# Altium PCB SPT3G_LCBoardRev5.PcbDoc (part 2 of 4)
Units mil, origin at the board's own origin, x right, y up, seen from the top; angles counter-clockwise.
Board outline 7275.33 x 1969 mil, 6 copper layers (Top Layer, Signal Layer 1, Internal Plane 1, Internal Plane 2, Signal Layer 2, Bottom Layer), stack 61.6 mil thick; 26 components, 141 nets, 668 pads, 146 vias.
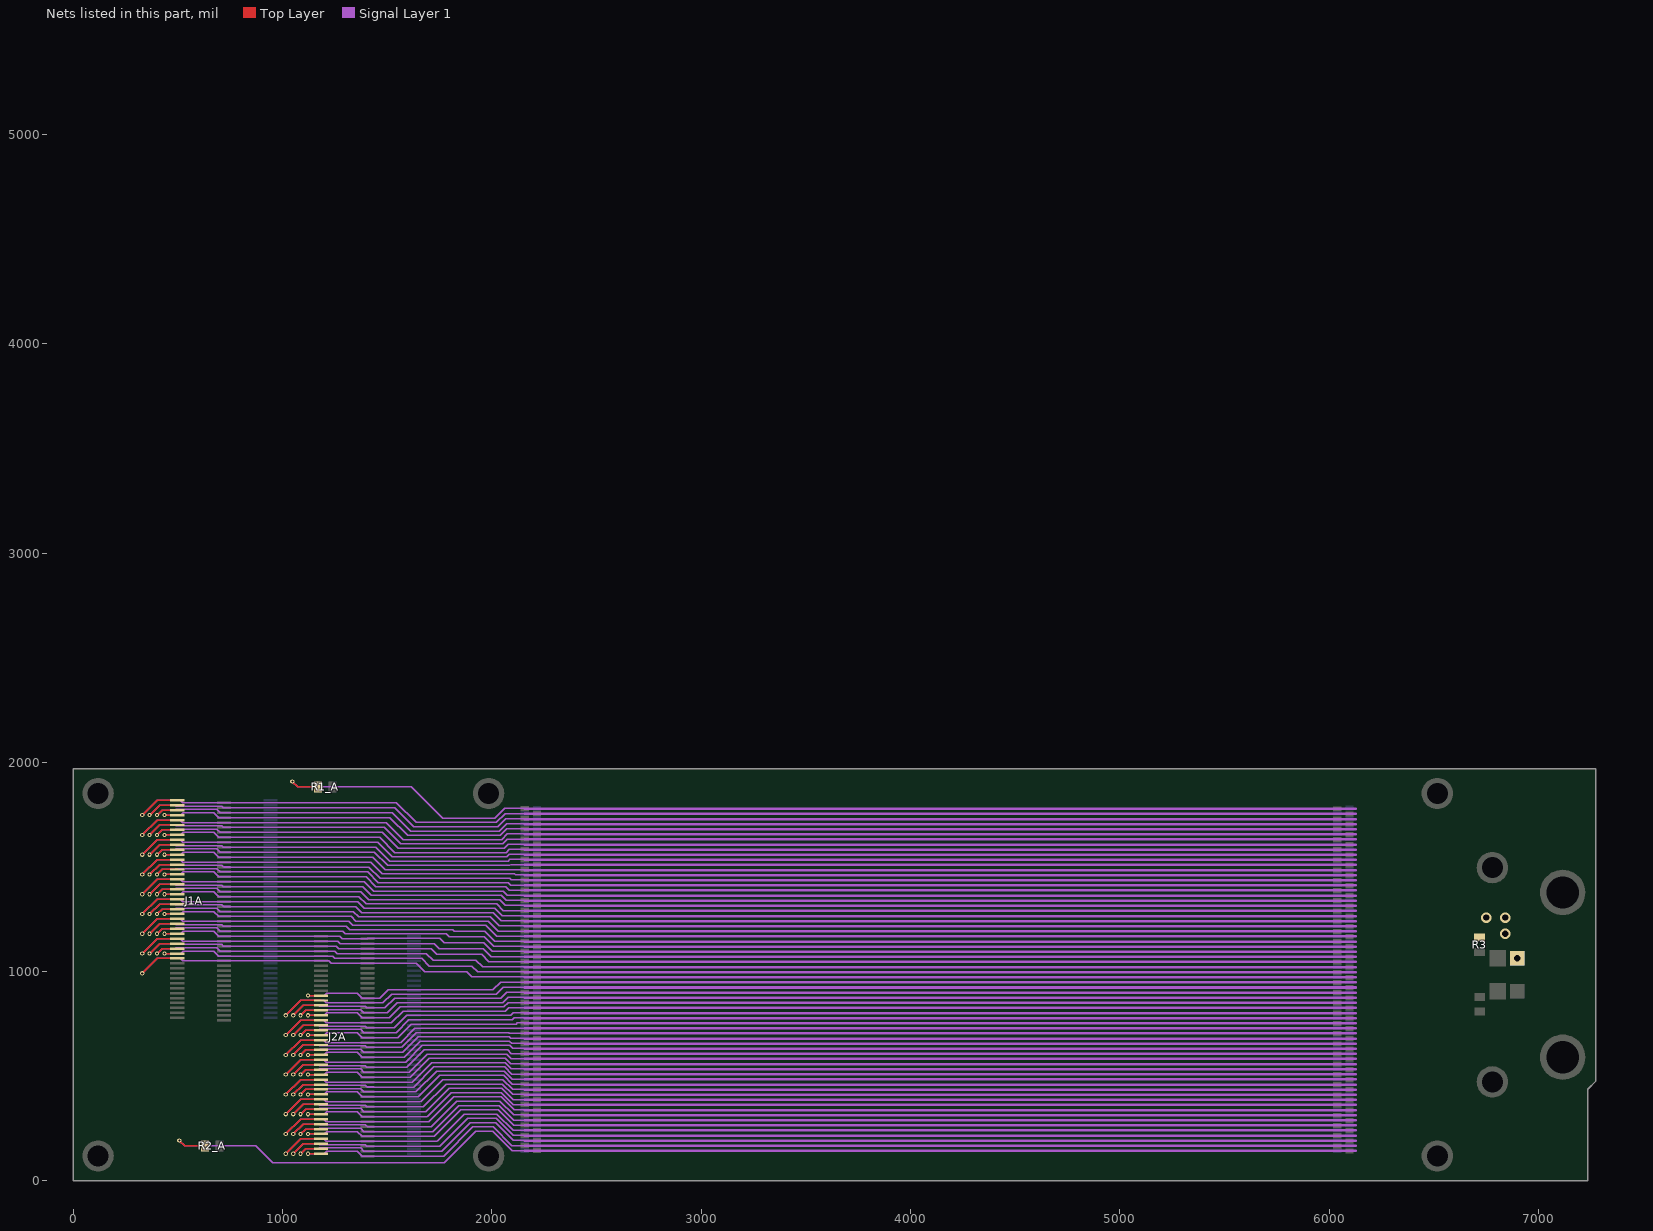
[diagram p6: the nets of this part, all layers, seen from the top]

## Via types
v1: diameter 20, hole 10, Top Layer to Bottom Layer, 136 vias
v2: diameter 50, hole 30, Top Layer to Bottom Layer, 10 vias

## Nets (pads, with @x,y where several pads share a name; then routed paths per layer and width w, separated by ;. In a path a pad name is that pad's centre, name@x,y a point inside that pad or via, vN(x,y) a via of type N, cw(c..) or ccw(c..) an arc to the next point about the centre after c; other vN are vias at no path point) (continued)
BOLORETURN_A: J1A.1 J1A.3 J1A.5 J1A.7 J1A.9 J1A.11 J1A.13 J1A.15 J1A.17 J1A.19 J1A.21 J1A.23 J1A.25 J1A.27 J1A.29 J1A.31 J1A.33 J1A.35 J1A.37 J1A.39 J1A.41 J1A.43 J1A.45 J1A.47 J1A.49 J1A.51 J1A.53 J1A.55 J1A.57 J1A.59 J1A.61 J1A.63 J1A.65 J2A.25 J2A.27 J2A.29 J2A.31 J2A.33 J2A.35 J2A.37 J2A.39 J2A.41 J2A.43 J2A.45 J2A.47 J2A.49 J2A.51 J2A.53 J2A.55 J2A.57 J2A.59 J2A.61 J2A.63 J2A.65 J2A.67 J2A.69 J2A.71 J2A.73 J2A.75 J2A.77 J2A.79 J2A.81 J2A.83 J2A.85 J2A.87 J2A.89 pad.0@6899.91,1063.92 R1_A.1 R2_A.1 R3.2 | length 384722.8
  Top Layer w6: v1(329.06,991.73) 399.92,1062.6 J1A.65@496.38,1062.6 ; v1(329.06,1086.22) 399.92,1157.09 J1A.57@496.38,1157.09 ; v1(329.06,1180.71) 399.92,1251.58 J1A.49@496.38,1251.58 ; v1(329.06,1275.2) 399.92,1346.06 J1A.41@496.38,1346.06 ; v1(329.06,1369.69) 399.92,1440.55 J1A.33@496.38,1440.55 ; v1(329.06,1464.17) 399.92,1535.04 J1A.25@496.38,1535.04 ; v1(329.06,1558.66) 399.92,1629.53 J1A.17@496.38,1629.53 ; v1(329.06,1653.15) 399.92,1724.02 J1A.9@496.38,1724.02 ; v1(329.06,1747.64) 399.92,1818.5 J1A.1@496.38,1818.5 ; v1(364.49,1086.22) 411.73,1133.46 J1A.59@496.38,1133.47 ; v1(364.49,1180.71) 411.73,1227.95 J1A.51@496.38,1227.95 ; v1(364.49,1275.2) 411.73,1322.44 J1A.43@496.38,1322.44 ; v1(364.49,1369.69) 411.73,1416.93 J1A.35@496.38,1416.93 ; v1(364.49,1464.17) 411.73,1511.42 J1A.27@496.38,1511.42 ; v1(364.49,1558.66) 411.73,1605.91 J1A.19@496.38,1605.91 ; v1(364.49,1653.15) 411.73,1700.39 J1A.11@496.38,1700.39 ; v1(364.49,1747.64) 411.73,1794.88 J1A.3@496.38,1794.88 ; v1(399.92,1086.22) 423.54,1109.84 J1A.61@496.38,1109.84 ; v1(399.92,1180.71) 423.54,1204.33 J1A.53@496.38,1204.33 ; v1(399.92,1275.2) 423.54,1298.82 J1A.45@496.38,1298.82 ; v1(399.92,1369.69) 423.54,1393.31 J1A.37@496.38,1393.31 ; v1(399.92,1464.17) 423.54,1487.8 J1A.29@496.38,1487.8 ; v1(399.92,1558.66) 423.54,1582.28 J1A.21@496.38,1582.28 ; v1(399.92,1653.15) 423.54,1676.77 J1A.13@496.38,1676.77 ; v1(399.92,1747.64) 423.54,1771.26 J1A.5@496.38,1771.26 ; v1(435.36,1086.22) J1A.63@496.38,1086.22 ; v1(435.35,1180.71) J1A.55@496.38,1180.71 ; v1(435.35,1275.2) J1A.47@496.38,1275.2 ; v1(435.35,1369.69) J1A.39@496.38,1369.69 ; v1(435.36,1464.17) J1A.31@496.38,1464.17 ; v1(435.36,1558.66) J1A.23@496.38,1558.66 ; v1(435.35,1653.15) J1A.15@496.38,1653.15 ; v1(435.35,1747.64) J1A.7@496.38,1747.64 ; v1(506.24,192.8) 531.78,167.27 R2_A.1@628.32,167.27 ; v1(1015.04,129.53) 1085.91,200.39 J2A.83@1182.36,200.39 ; v1(1015.04,224.02) 1085.91,294.88 J2A.75@1182.36,294.88 ; v1(1015.04,318.5) 1085.91,389.37 J2A.67@1182.36,389.37 ; v1(1015.04,412.99) 1085.91,483.86 J2A.59@1182.36,483.86 ; v1(1015.04,507.48) 1085.91,578.35 J2A.51@1182.36,578.35 ; v1(1015.04,601.97) 1085.91,672.84 J2A.43@1182.36,672.84 ; v1(1015.04,696.46) 1085.91,767.32 J2A.35@1182.36,767.32 ; v1(1015.04,790.95) 1085.91,861.81 J2A.27@1182.36,861.81 ; v1(1046.3,1908.04) 1071.83,1882.5 R1_A.1@1168.38,1882.5 ; v1(1050.47,129.53) 1097.72,176.77 J2A.85@1182.36,176.77 ; v1(1050.47,224.02) 1097.72,271.26 J2A.77@1182.36,271.26 ; v1(1050.47,318.5) 1097.72,365.75 J2A.69@1182.36,365.75 ; v1(1050.47,412.99) 1097.72,460.24 J2A.61@1182.36,460.24 ; v1(1050.47,507.48) 1097.72,554.73 J2A.53@1182.36,554.72 ; v1(1050.47,601.97) 1097.72,649.21 J2A.45@1182.36,649.21 ; v1(1050.47,696.46) 1097.72,743.7 J2A.37@1182.36,743.7 ; v1(1050.47,790.95) 1097.72,838.19 J2A.29@1182.36,838.19 ; v1(1085.91,129.53) 1109.53,153.15 J2A.87@1182.36,153.15 ; v1(1085.91,224.02) 1109.53,247.64 J2A.79@1182.36,247.64 ; v1(1085.91,318.5) 1109.53,342.13 J2A.71@1182.36,342.13 ; v1(1085.91,412.99) 1109.53,436.61 J2A.63@1182.36,436.61 ; v1(1085.91,507.48) 1109.53,531.1 J2A.55@1182.36,531.1 ; v1(1085.91,601.97) 1109.53,625.59 J2A.47@1182.36,625.59 ; v1(1085.91,696.46) 1109.53,720.08 J2A.39@1182.36,720.08 ; v1(1085.91,790.95) 1109.53,814.57 J2A.31@1182.36,814.57 ; v1(1121.34,129.53) J2A.89@1182.36,129.53 ; v1(1121.34,224.02) J2A.81@1182.36,224.02 ; v1(1121.34,318.5) J2A.73@1182.36,318.5 ; v1(1121.34,412.99) J2A.65@1182.36,412.99 ; v1(1121.34,507.48) J2A.57@1182.36,507.48 ; v1(1121.34,601.97) J2A.49@1182.36,601.97 ; v1(1121.34,696.46) J2A.41@1182.36,696.46 ; v1(1121.34,790.95) J2A.33@1182.36,790.95 ; v1(1121.34,885.43) J2A.25@1182.36,885.43
  Signal Layer 1 w6: v1(329.06,991.73) 399.92,1062.6 510.86,1062.6 522.68,1050.79 748.86,1050.79 ; v1(329.06,1086.22) 399.92,1157.09 510.86,1157.09 522.68,1145.28 748.86,1145.28 ; v1(329.06,1180.71) 399.92,1251.58 510.86,1251.58 522.68,1239.76 748.86,1239.76 ; v1(329.06,1275.2) 399.92,1346.06 510.86,1346.06 522.68,1334.25 748.86,1334.25 ; v1(329.06,1369.69) 399.92,1440.55 510.86,1440.55 522.68,1428.74 748.86,1428.74 ; v1(329.06,1464.17) 399.92,1535.04 510.86,1535.04 522.68,1523.23 1419.84,1523.23 1476.55,1466.52 1958.38,1466.52 ; v1(329.06,1558.66) 399.92,1629.53 510.86,1629.53 522.68,1617.72 748.86,1617.72 ; v1(329.06,1653.15) 399.92,1724.02 510.86,1724.02 522.68,1712.21 748.86,1712.21 ; v1(329.06,1747.64) 399.92,1818.5 510.86,1818.5 522.68,1806.69 1543.46,1806.69 1637.76,1712.4 1958.38,1712.4 ; v1(364.49,1086.22) 411.73,1133.46 486.38,1133.46 490.32,1129.53 708.21,1129.53 715.74,1122 748.86,1122 ; v1(364.49,1180.71) 411.73,1227.95 486.38,1227.95 490.32,1224.02 708.21,1224.02 715.74,1216.49 748.86,1216.49 ; v1(364.49,1275.2) 411.73,1322.44 486.38,1322.44 490.32,1318.5 708.21,1318.5 715.74,1310.98 748.86,1310.98 ; v1(364.49,1369.69) 411.73,1416.93 486.38,1416.93 490.32,1412.99 708.21,1412.99 715.74,1405.47 748.86,1405.47 ; v1(364.49,1464.17) 411.73,1511.42 486.38,1511.42 490.32,1507.48 708.21,1507.48 715.74,1499.96 748.86,1499.96 ; v1(364.49,1558.66) 411.73,1605.91 486.38,1605.91 490.32,1601.97 708.21,1601.97 715.74,1594.45 748.86,1594.45 ; v1(364.49,1653.15) 411.73,1700.39 486.38,1700.39 490.32,1696.46 708.21,1696.46 715.74,1688.93 748.86,1688.93 ; v1(364.49,1747.64) 411.73,1794.88 486.38,1794.88 490.32,1790.95 708.21,1790.95 715.74,1783.42 748.86,1783.42 ; v1(399.92,1086.22) 423.54,1109.84 486.38,1109.84 490.32,1113.78 686.31,1113.78 702.06,1098.03 748.86,1098.03 ; v1(399.92,1180.71) 423.54,1204.33 486.38,1204.33 490.32,1208.27 686.31,1208.27 702.06,1192.52 748.86,1192.52 ; v1(399.92,1275.2) 423.54,1298.82 486.38,1298.82 490.32,1302.76 686.31,1302.76 702.06,1287.01 748.86,1287.01 ; v1(399.92,1369.69) 423.54,1393.31 486.38,1393.31 490.32,1397.24 686.31,1397.24 702.06,1381.5 1374.18,1381.5 1412.1,1343.58 1958.38,1343.58 ; v1(399.92,1464.17) 423.54,1487.8 486.38,1487.8 490.32,1491.73 686.31,1491.73 702.06,1475.98 1406.47,1475.98 1456.92,1425.54 1958.38,1425.54 ; v1(399.92,1558.66) 423.54,1582.28 486.38,1582.28 490.32,1586.22 686.31,1586.22 702.06,1570.47 748.86,1570.47 ; v1(399.92,1653.15) 423.54,1676.77 486.38,1676.77 490.32,1680.71 686.31,1680.71 702.06,1664.96 1476.99,1664.96 1552.49,1589.46 1958.38,1589.46 ; v1(399.92,1747.64) 423.54,1771.26 486.38,1771.26 490.32,1775.2 686.31,1775.2 702.06,1759.45 1524.09,1759.45 1612.12,1671.42 1958.38,1671.42 ; v1(435.36,1086.22) 512.61,1086.22 524.42,1098.03 670.42,1098.03 694.04,1074.41 748.86,1074.41 ; v1(435.35,1180.71) 512.61,1180.71 524.42,1192.52 670.42,1192.52 694.04,1168.9 748.86,1168.9 ; v1(435.35,1275.2) 512.61,1275.2 524.42,1287.01 670.42,1287.01 694.04,1263.39 1328.07,1263.39 1350.33,1241.13 1958.38,1241.13 ; v1(435.35,1369.69) 512.61,1369.69 524.42,1381.5 670.42,1381.5 694.04,1357.87 748.86,1357.87 ; v1(435.36,1464.17) 512.61,1464.17 524.42,1475.98 670.42,1475.98 694.04,1452.36 748.86,1452.36 ; v1(435.36,1558.66) 512.61,1558.66 524.42,1570.47 670.42,1570.47 694.04,1546.85 748.86,1546.85 ; v1(435.35,1653.15) 512.61,1653.15 524.42,1664.96 670.42,1664.96 694.04,1641.34 748.86,1641.34 ; v1(435.35,1747.64) 512.61,1747.64 524.42,1759.45 670.42,1759.45 694.04,1735.83 748.86,1735.83 ; v1(506.24,192.8) 531.78,167.27 871.18,167.27 951.81,86.64 1772.92,86.64 1923.4,237.11 1958.38,237.11 ; 718.82,1050.79 1182.36,1050.79 1221.28,1050.79 ; 718.82,1074.41 1182.36,1074.41 1238.26,1074.41 ; 718.82,1098.03 1182.36,1098.03 1248.47,1098.03 ; 718.82,1121.65 1182.36,1121.65 1257.03,1121.65 ; 718.82,1145.28 1182.36,1145.28 1263.24,1145.28 ; 718.82,1168.9 1273.7,1168.9 1285.51,1157.09 1404.8,1157.09 1406.88,1159.16 1750.44,1159.16 1771.95,1137.65 1958.72,1137.65 ; 718.82,1192.52 1287.03,1192.52 1299.9,1179.65 1781.49,1179.65 1795.73,1165.41 1958.72,1165.41 ; 718.82,1216.14 1304.54,1216.14 1320.54,1200.14 1812.16,1200.14 1819.14,1193.17 1958.72,1193.17 ; 718.82,1239.76 1315.52,1239.76 1334.37,1220.92 1958.72,1220.92 ; 718.82,1287.01 1338.05,1287.01 1363.45,1261.62 1958.38,1261.62 ; 718.82,1310.63 1349.04,1310.63 1377.56,1282.11 1958.38,1282.11 ; 718.82,1334.25 1357.79,1334.25 1389.45,1302.6 1958.38,1302.6 ; 718.82,1357.87 1363.52,1357.87 1398.31,1323.09 1958.38,1323.09 ; 718.82,1405.12 1383.49,1405.12 1424.55,1364.07 1958.38,1364.07 ; 718.82,1428.74 1390.57,1428.74 1434.76,1384.56 1958.38,1384.56 ; 718.82,1452.36 1398.72,1452.36 1446.03,1405.05 1958.38,1405.05 ; 718.82,1499.61 1411.85,1499.61 1465.43,1446.03 1958.38,1446.03 ; 718.82,1546.85 1430,1546.85 1489.84,1487.01 1958.38,1487.01 ; 718.82,1570.47 1438.9,1570.47 1501.88,1507.5 1958.38,1507.5 ; 718.82,1594.09 1445.76,1594.09 1511.87,1527.99 1958.38,1527.99 ; 718.82,1617.72 1454.69,1617.72 1523.93,1548.48 1958.38,1548.48 ; 718.82,1641.34 1463.21,1641.34 1535.58,1568.97 1958.38,1568.97 ; 718.82,1688.58 1484.62,1688.58 1563.26,1609.95 1776.38,1609.95 ; 718.82,1712.21 1495.61,1712.21 1577.38,1630.44 1958.38,1630.44 ; 718.82,1735.83 1512.18,1735.83 1597.08,1650.93 1726.38,1650.93 ; 718.82,1783.07 1535.27,1783.07 1626.43,1691.91 1958.38,1691.91 ; v1(1015.04,129.53) 1085.91,200.39 1196.85,200.39 1208.66,188.58 1434.84,188.58 ; v1(1015.04,224.02) 1085.91,294.88 1196.85,294.88 1208.66,283.07 1434.84,283.07 ; v1(1015.04,318.5) 1085.91,389.37 1196.85,389.37 1208.66,377.56 1434.84,377.56 ; v1(1015.04,412.99) 1085.91,483.86 1196.85,483.86 1208.66,472.05 1434.84,472.05 ; v1(1015.04,507.48) 1085.91,578.35 1196.85,578.35 1208.66,566.54 1434.84,566.54 ; v1(1015.04,601.97) 1085.91,672.84 1196.85,672.84 1208.66,661.02 1434.84,661.02 ; v1(1015.04,696.46) 1085.91,767.32 1196.85,767.32 1208.66,755.51 1434.84,755.51 ; v1(1015.04,790.95) 1085.91,861.81 1196.85,861.81 1208.66,850 1434.84,850 ; v1(1046.3,1908.04) 1071.83,1882.5 1614.87,1882.5 1764.49,1732.89 1958.38,1732.89 ; v1(1050.47,129.53) 1097.72,176.77 1172.36,176.77 1176.3,172.84 1394.2,172.84 1402.07,164.96 1751.59,164.96 ; v1(1050.47,224.02) 1097.72,271.26 1172.36,271.26 1176.3,267.32 1394.2,267.32 1401.72,259.8 ; v1(1050.47,318.5) 1097.72,365.75 1172.36,365.75 1176.3,361.81 1394.2,361.81 1401.72,354.29 1434.84,354.29 ; v1(1050.47,412.99) 1097.72,460.24 1172.36,460.24 1176.3,456.3 1394.2,456.3 1401.72,448.78 1434.84,448.78 ; v1(1050.47,507.48) 1097.72,554.73 1172.36,554.73 1176.3,550.79 1394.2,550.79 1401.72,543.26 1434.84,543.26 ; v1(1050.47,601.97) 1097.72,649.21 1172.36,649.21 1176.3,645.28 1394.2,645.28 1401.72,637.75 1434.84,637.75 ; v1(1050.47,696.46) 1097.72,743.7 1172.36,743.7 1176.3,739.76 1394.2,739.76 1401.72,732.24 1434.84,732.24 ; v1(1050.47,790.95) 1097.72,838.19 1172.36,838.19 1176.3,834.25 1394.2,834.25 1401.72,826.73 1434.84,826.73 ; v1(1085.91,129.53) 1109.53,153.15 1172.36,153.15 1176.3,157.09 1372.29,157.09 1388.04,141.34 1434.84,141.34 ; v1(1085.91,224.02) 1109.53,247.64 1172.36,247.64 1176.3,251.58 1372.29,251.58 1388.04,235.83 1434.84,235.83 ; v1(1085.91,318.5) 1109.53,342.13 1172.36,342.13 1176.3,346.06 1372.29,346.06 1388.04,330.32 1434.84,330.32 ; v1(1085.91,412.99) 1109.53,436.61 1172.36,436.61 1176.3,440.55 1372.29,440.55 1388.04,424.8 1434.84,424.8 ; v1(1085.91,507.48) 1109.53,531.1 1172.36,531.1 1176.3,535.04 1372.29,535.04 1388.04,519.29 1605.01,519.29 1691.68,605.93 1958.38,605.93 ; v1(1085.91,601.97) 1109.53,625.59 1172.36,625.59 1176.3,629.53 1372.29,629.53 1388.04,613.78 1434.84,613.78 ; v1(1085.91,696.46) 1109.53,720.08 1172.36,720.08 1176.3,724.02 1372.29,724.02 1388.04,708.27 1434.84,708.27 ; v1(1085.91,790.95) 1109.53,814.57 1172.36,814.57 1176.3,818.5 1372.29,818.5 1388.04,802.76 1434.84,802.76 ; v1(1121.34,129.53) 1198.59,129.53 1210.4,141.34 1356.4,141.34 1380.02,117.72 1434.84,117.72 ; v1(1121.34,224.02) 1198.59,224.02 1210.4,235.83 1356.4,235.83 1380.02,212.21 1434.84,212.21 ; v1(1121.34,318.5) 1198.59,318.5 1210.4,330.32 1356.4,330.32 1380.02,306.69 1434.84,306.69 ; v1(1121.34,412.99) 1198.59,412.99 1210.4,424.8 1356.4,424.8 1380.02,401.18 1434.84,401.18 ; v1(1121.34,507.48) 1198.59,507.48 1210.4,519.29 1356.4,519.29 1380.02,495.67 1434.84,495.67 ; v1(1121.34,601.97) 1198.59,601.97 1210.4,613.78 1356.4,613.78 1380.02,590.16 1580.94,590.16 1658.15,667.4 1958.38,667.4 ; v1(1121.34,696.46) 1198.59,696.46 1210.4,708.27 1356.4,708.27 1380.02,684.65 1434.84,684.65 ; v1(1121.34,790.95) 1198.59,790.95 1210.4,802.76 1356.4,802.76 1380.02,779.13 1434.84,779.13 ; v1(1121.34,885.43) 1198.59,885.43 1210.4,897.24 1356.4,897.24 1380.02,873.62 1463.75,873.62 ; 1221.22,1050.79 1233.03,1038.98 1639.45,1038.98 1679.55,998.87 1861.66,998.87 ; 1238.23,1074.41 1250.04,1062.6 1663.61,1062.6 1699.58,1026.63 1861.66,1026.63 ; 1248.36,1098.03 1260.17,1086.22 1687.06,1086.22 1718.89,1054.39 1861.66,1054.39 ; 1257.11,1121.65 1268.92,1109.84 1404.8,1109.84 1709.33,1109.84 1737.03,1082.14 1951.07,1082.14 ; 1263.33,1145.28 1275.14,1133.47 1404.8,1133.47 1725.49,1133.47 1749.06,1109.9 1958.72,1109.9 ; 1404.8,117.72 1769.75,117.72 ; 1404.8,141.34 1759.75,141.34 ; 1404.8,188.58 1737.07,188.58 ; 1404.8,212.21 1724.61,212.21 ; 1404.8,235.83 1716.65,235.83 1840.9,360.05 1958.38,360.05 ; 1404.8,259.45 1709.93,259.45 ; 1404.8,283.07 1698.9,283.07 ; 1404.8,306.69 1689.72,306.69 ; 1404.8,330.32 1684.22,330.32 ; 1404.8,353.94 1671.96,353.94 ; 1404.8,377.56 1658.47,377.56 ; 1404.8,401.18 1648.26,401.18 ; 1404.8,424.8 1636,424.8 1735.2,523.97 1958.38,523.97 ; 1404.8,448.43 1627.23,448.43 ; 1404.8,472.05 1618.46,472.05 ; 1404.8,495.67 1610.91,495.67 ; 1404.8,542.91 1592.13,542.91 ; 1404.8,566.54 1587.05,566.54 ; 1404.8,613.78 1574.42,613.78 ; 1404.8,637.4 1567.7,637.4 ; 1404.8,661.02 1563.03,661.02 ; 1404.8,684.65 1549.13,684.65 1613.84,749.36 1958.38,749.36 ; 1404.8,708.27 1541.79,708.27 1603.37,769.85 1958.38,769.85 ; 1404.8,731.89 1533.83,731.89 ; 1404.8,755.51 1519.93,755.51 ; 1404.8,779.13 1510.34,779.13 ; 1404.8,802.76 1499.16,802.76 ; 1404.8,826.38 1488.86,826.38 1534.8,872.3 1958.38,872.3 ; 1404.8,850 1478.26,850 ; 1464.02,873.62 1503.68,913.28 1958.38,913.28 ; 1477.74,850 1520.54,892.79 1958.38,892.79 ; 1499.64,802.76 1548.7,851.81 1958.38,851.81 ; 1510.4,779.13 1562.59,831.32 1958.38,831.32 ; 1520.06,755.51 1575.38,810.83 1958.38,810.83 ; 1533.66,731.89 1592.11,790.34 1958.38,790.34 ; 1563.25,661.02 1631.1,728.87 1958.38,728.87 ; 1568.15,637.4 1639.13,708.38 1958.38,708.38 ; 1574.53,613.78 1648.64,687.89 1958.38,687.89 ; 1587.28,566.54 1667.66,646.91 1958.38,646.91 ; 1592.28,542.91 1675.79,626.42 1958.38,626.42 ; 1610.89,495.67 1700.67,585.44 1958.38,585.44 ; 1618.68,472.05 1711.59,564.95 1958.38,564.95 ; 1627.17,448.43 1723.21,544.46 1958.38,544.46 ; 1648.41,401.18 1750.71,503.48 1958.38,503.48 ; 1658.78,377.56 1764.22,482.99 1958.38,482.99 ; 1672.16,353.94 1780.73,462.5 1958.38,462.5 ; 1684.54,330.32 1796.24,442.01 1958.38,442.01 ; 1689.92,306.69 1804.75,421.52 1958.38,421.52 ; 1698.98,283.07 1816.94,401.03 1958.38,401.03 ; 1709.95,259.45 1831.04,380.54 1958.38,380.54 ; 1724.74,212.21 1852.1,339.56 1958.38,339.56 ; 1737.64,188.58 1868.13,319.07 1958.38,319.07 ; 1751.43,164.96 1885.05,298.58 1958.38,298.58 ; 1759.74,141.34 1896.5,278.09 1958.38,278.09 ; 1769.67,117.72 1909.55,257.6 1958.38,257.6 ; 2126.38,144.25 2215.78,144.25 ; 2126.38,168.66 2156.73,168.66 ; 2126.38,193.07 2215.78,193.07 ; 2126.38,217.48 2156.73,217.48 ; 2126.38,241.89 2215.78,241.89 ; 2126.38,266.3 2156.73,266.3 ; 2126.38,290.71 2215.78,290.71 ; 2126.38,315.11 2156.73,315.11 ; 2126.38,339.52 2215.78,339.52 ; 2126.38,363.93 2156.73,363.93 ; 2126.38,388.34 2215.78,388.34 ; 2126.38,412.75 2156.73,412.75 ; 2126.38,437.16 2215.78,437.16 ; 2126.38,461.57 2156.73,461.57 ; 2126.38,485.98 2215.78,485.98 ; 2126.38,510.39 2156.73,510.39 ; 2126.38,534.8 2215.78,534.8 ; 2126.38,559.21 2156.73,559.21 ; 2126.38,583.62 2215.78,583.62 ; 2126.38,608.03 2156.73,608.03 ; 2126.38,632.44 2215.78,632.44 ; 2126.38,656.85 2156.73,656.85 ; 2126.38,681.26 2215.78,681.26 ; 2126.38,705.67 2156.73,705.67 ; 2126.38,730.08 2215.78,730.08 ; 2126.38,754.48 2156.73,754.48 ; 2126.38,778.89 2215.78,778.89 ; 2126.38,803.3 2156.73,803.3 ; 2126.38,827.71 2215.78,827.71 ; 2126.38,852.12 2156.73,852.12 ; 2126.38,876.53 2215.78,876.53 ; 2126.38,900.94 2156.73,900.94 ; 2126.38,925.35 2215.78,925.35 ; 2126.38,949.76 2156.73,949.76 ; 2126.38,974.17 2215.78,974.17 ; 2126.38,998.58 2156.73,998.58 ; 2126.38,1022.99 2215.78,1022.99 ; 2126.38,1047.4 2156.73,1047.4 ; 2126.38,1071.81 2215.78,1071.81 ; 2126.38,1096.22 2156.73,1096.22 ; 2126.38,1120.63 2215.78,1120.63 ; 2126.38,1145.04 2156.73,1145.04 ; 2126.38,1169.45 2215.78,1169.45 ; 2126.38,1193.85 2156.73,1193.85 ; 2126.38,1218.26 2215.78,1218.26 ; 2126.38,1242.67 2156.73,1242.67 ; 2126.38,1267.08 2215.78,1267.08 ; 2126.38,1291.49 2156.73,1291.49 ; 2126.38,1315.9 2215.78,1315.9 ; 2126.38,1340.31 2156.73,1340.31 ; 2126.38,1364.72 2215.78,1364.72 ; 2126.38,1389.13 2156.73,1389.13 ; 2126.38,1413.54 2215.78,1413.54 ; 2126.38,1437.95 2156.73,1437.95 ; 2126.38,1462.36 2215.78,1462.36 ; 2126.38,1486.77 2156.73,1486.77 ; 2126.38,1511.18 2215.78,1511.18 ; 2126.38,1535.59 2156.73,1535.59 ; 2126.38,1560 2215.78,1560 ; 2126.38,1584.41 2156.73,1584.41 ; 2126.38,1608.82 2215.78,1608.82 ; 2126.38,1633.22 2156.73,1633.22 ; 2126.38,1657.63 2215.78,1657.63 ; 2126.38,1682.04 2156.73,1682.04 ; 2126.38,1706.45 2215.78,1706.45 ; 2126.38,1730.86 2156.73,1730.86 ; 2126.38,1755.27 2215.78,1755.27 ; 2126.38,1779.68 2156.73,1779.68 ; 1726.38,1650.93 1958.38,1650.93 1726.38,1650.93 ; 1776.38,1609.95 1958.38,1609.95 1776.38,1609.95
  Signal Layer 1 w6.01: 1861.66,998.87 1879.11,998.87 1903.81,974.17 2126.38,974.17 ; 1861.66,1026.63 1904.32,1026.63 1932.38,998.58 2126.38,998.58 ; 1861.66,1054.39 1923.82,1054.39 1955.21,1022.99 2126.38,1022.99 ; 1951.07,1082.14 1985.81,1047.4 2126.38,1047.4 ; 1958.38,237.11 2004.47,237.11 2097.33,144.25 2126.38,144.25 ; 1958.38,257.6 2006.9,257.6 2095.84,168.66 2126.38,168.66 ; 1958.38,278.09 2017.97,278.09 2102.99,193.07 2126.38,193.07 ; 1958.38,298.58 2021.48,298.58 2102.59,217.48 2126.38,217.48 ; 1958.38,319.07 2023.66,319.07 2100.85,241.89 2126.38,241.89 ; 1958.38,339.56 2030.29,339.56 2103.55,266.3 2126.38,266.3 ; 1958.38,360.05 2036.02,360.05 2105.37,290.71 2126.38,290.71 ; 1958.38,380.54 2038.2,380.54 2103.63,315.11 2126.38,315.11 ; 1958.38,401.03 2045.72,401.03 2107.22,339.52 2126.38,339.52 ; 1958.38,421.52 2043.9,421.52 2101.48,363.93 2126.38,363.93 ; 1958.38,442.01 2047.85,442.01 2101.52,388.34 2126.38,388.34 ; 1958.38,462.5 2050.03,462.5 2099.78,412.75 2126.38,412.75 ; 1958.38,482.99 2052.66,482.99 2098.49,437.16 2126.38,437.16 ; 1958.38,503.48 2055.73,503.48 2097.64,461.57 2126.38,461.57 ; 1958.38,523.97 2059.68,523.97 2097.67,485.98 2126.38,485.98 ; 1958.38,544.46 2060.53,544.46 2094.6,510.39 2126.38,510.39 ; 1958.38,564.95 2063.15,564.95 2093.31,534.8 2126.38,534.8 ; 1958.38,585.44 2064.44,585.44 2090.68,559.21 2126.38,559.21 ; 1958.38,605.93 2069.73,605.93 2092.05,583.62 2126.38,583.62 ; 1958.38,626.42 2074.58,626.42 2092.98,608.03 2126.38,608.03 ; 1958.38,646.91 2084.76,646.91 2099.24,632.44 2126.38,632.44 ; 1958.38,667.4 2083.39,667.4 2093.94,656.85 2126.38,656.85 ; 1958.38,687.89 2082.45,687.89 2089.09,681.26 2126.38,681.26 ; 1958.38,708.38 2080.63,708.38 2083.35,705.67 2126.38,705.67 ; 1958.38,728.87 2105.05,728.87 2106.25,730.08 2126.38,730.08 ; 1958.38,749.36 2116.65,749.36 2121.77,754.48 2126.38,754.48 ; 1958.38,769.85 2097.14,769.85 2106.18,778.89 2126.38,778.89 ; 1958.38,790.34 2090.07,790.34 2103.03,803.3 2126.38,803.3 ; 1958.38,810.83 2062.99,810.83 2079.87,827.71 2126.38,827.71 ; 1958.38,831.32 2056.82,831.32 2077.61,852.12 2126.38,852.12 ; 1958.38,851.81 2052.41,851.81 2077.13,876.53 2126.38,876.53 ; 1958.38,872.3 2042.23,872.3 2070.87,900.94 2126.38,900.94 ; 1958.38,892.79 2020.49,892.79 2053.05,925.35 2126.38,925.35 ; 1958.38,913.28 2004.98,913.28 2041.46,949.76 2126.38,949.76 ; 1958.38,1241.13 1981.91,1241.13 2029.18,1193.85 2126.38,1193.85 ; 1958.38,1261.62 1992.2,1261.62 2035.55,1218.26 2126.38,1218.26 ; 1958.38,1282.11 2006.07,1282.11 2045.5,1242.67 2126.38,1242.67 ; 1958.38,1302.6 2014.22,1302.6 2049.73,1267.08 2126.38,1267.08 ; 1958.38,1323.09 2023.08,1323.09 2054.67,1291.49 2126.38,1291.49 ; 1958.38,1343.58 2036.23,1343.58 2063.91,1315.9 2126.38,1315.9 ; 1958.38,1364.07 2043.66,1364.07 2067.42,1340.31 2126.38,1340.31 ; 1958.38,1384.56 2053.95,1384.56 2073.79,1364.72 2126.38,1364.72 ; 1958.38,1405.05 2066.39,1405.05 2082.31,1389.13 2126.38,1389.13 ; 1958.38,1425.54 2078.12,1425.54 2090.11,1413.54 2126.38,1413.54 ; 1958.38,1446.03 2084.83,1446.03 2092.91,1437.95 2126.38,1437.95 ; 1958.38,1466.52 2108.01,1466.52 2112.17,1462.36 2126.38,1462.36 ; 1958.38,1487.01 2126.14,1487.01 2126.38,1486.77 ; 1958.38,1507.5 2085.09,1507.5 2088.77,1511.18 2126.38,1511.18 ; 1958.38,1527.99 2078.38,1527.99 2085.98,1535.59 2126.38,1535.59 ; 1958.38,1548.48 2070.23,1548.48 2081.75,1560 2126.38,1560 ; 1958.38,1568.97 2067.32,1568.97 2082.75,1584.41 2126.38,1584.41 ; 1958.38,1589.46 2057.77,1589.46 2077.13,1608.82 2126.38,1608.82 ; 1958.38,1609.95 2050.88,1609.95 2074.16,1633.22 2126.38,1633.22 ; 1958.38,1630.44 2046.96,1630.44 2074.16,1657.63 2126.38,1657.63 ; 1958.38,1650.93 2039.53,1650.93 2070.65,1682.04 2126.38,1682.04 ; 1958.38,1671.42 2034.96,1671.42 2070,1706.45 2126.38,1706.45 ; 1958.38,1691.91 2026.82,1691.91 2065.78,1730.86 2126.38,1730.86 ; 1958.38,1712.4 2020.11,1712.4 2062.98,1755.27 2126.38,1755.27 ; 1958.38,1732.89 2013.39,1732.89 2060.19,1779.68 2126.38,1779.68 ; 1958.72,1109.9 1959.22,1109.9 1997.31,1071.81 2126.38,1071.81 ; 1958.72,1137.65 1960.1,1137.65 2001.54,1096.22 2126.38,1096.22 ; 1958.72,1165.41 1963.13,1165.41 2007.91,1120.63 2126.38,1120.63 ; 1958.72,1193.17 1966.15,1193.17 2014.28,1145.04 2126.38,1145.04 ; 1958.72,1220.92 1970.61,1220.92 2022.09,1169.45 2126.38,1169.45
  Signal Layer 1 w12: 2156.38,143.17 6128.42,143.17 ; 2156.38,167.57 6128.42,167.57 ; 2156.38,191.97 6128.42,191.97 ; 2156.38,216.37 6128.42,216.37 ; 2156.38,240.76 6128.42,240.76 ; 2156.38,265.16 6128.42,265.16 ; 2156.38,289.56 6128.42,289.56 ; 2156.38,313.96 6128.42,313.96 ; 2156.38,338.35 6128.42,338.35 ; 2156.38,362.75 6128.42,362.75 ; 2156.38,387.15 6128.42,387.15 ; 2156.38,411.55 6128.42,411.55 ; 2156.38,435.95 6128.42,435.95 ; 2156.38,460.34 6128.42,460.34 ; 2156.38,484.74 6128.42,484.74 ; 2156.38,509.14 6128.42,509.14 ; 2156.38,533.54 6128.42,533.54 ; 2156.38,557.93 6128.42,557.93 ; 2156.38,582.33 6128.42,582.33 ; 2156.38,606.73 6128.42,606.73 ; 2156.38,631.13 6128.42,631.13 ; 2156.38,655.52 6128.42,655.52 ; 2156.38,679.92 6128.42,679.92 ; 2156.38,704.32 6128.42,704.32 ; 2156.38,728.72 6128.42,728.72 ; 2156.38,753.11 6128.42,753.11 ; 2156.38,777.51 6128.42,777.51 ; 2156.38,801.91 6128.42,801.91 ; 2156.38,826.31 6128.42,826.31 ; 2156.38,850.7 6128.42,850.7 ; 2156.38,875.1 6128.42,875.1 ; 2156.38,899.5 6128.42,899.5 ; 2156.38,923.9 6128.42,923.9 ; 2156.38,948.29 6128.42,948.29 ; 2156.38,972.69 6128.42,972.69 ; 2156.38,997.09 6128.42,997.09 ; 2156.38,1021.49 6128.42,1021.49 ; 2156.38,1045.89 6128.42,1045.89 ; 2156.38,1070.28 6128.42,1070.28 ; 2156.38,1094.68 6128.42,1094.68 ; 2156.38,1119.08 6128.42,1119.08 ; 2156.38,1143.48 6128.42,1143.48 ; 2156.38,1167.87 6128.42,1167.87 ; 2156.38,1192.27 6128.42,1192.27 ; 2156.38,1216.67 6128.42,1216.67 ; 2156.38,1241.07 6128.42,1241.07 ; 2156.38,1265.46 6128.42,1265.46 ; 2156.38,1289.86 6128.42,1289.86 ; 2156.38,1314.26 6128.42,1314.26 ; 2156.38,1338.66 6128.42,1338.66 ; 2156.38,1363.05 6128.42,1363.05 ; 2156.38,1387.45 6128.42,1387.45 ; 2156.38,1411.85 6128.42,1411.85 ; 2156.38,1436.25 6128.42,1436.25 ; 2156.38,1460.64 6128.42,1460.64 ; 2156.38,1485.04 6128.42,1485.04 ; 2156.38,1509.44 6128.42,1509.44 ; 2156.38,1533.84 6128.42,1533.84 ; 2156.38,1558.23 6128.42,1558.23 ; 2156.38,1582.63 6128.42,1582.63 ; 2156.38,1607.03 6128.42,1607.03 ; 2156.38,1631.43 6128.42,1631.43 ; 2156.38,1655.83 6128.42,1655.83 ; 2156.38,1680.22 6128.42,1680.22 ; 2156.38,1704.62 6128.42,1704.62 ; 2156.38,1729.02 6128.42,1729.02 ; 2156.38,1753.42 6128.42,1753.42 ; 2156.38,1777.81 6128.42,1777.81
  other v2: 6899.91,1063.92 6842.27,1180.71 6751.12,1258.06 6842.27,1258.06